# Altium PCB EP4CE55F23C8N_A.PcbDoc
Units mil, origin at the board's own origin, x right, y up, seen from the top; angles counter-clockwise.
Board outline 3300 x 3400 mil, 2 copper layers (Top Layer, Bottom Layer); 161 components, 160 nets, 648 pads, 484 vias.
Unrouted connection lines stored in the file: 160.
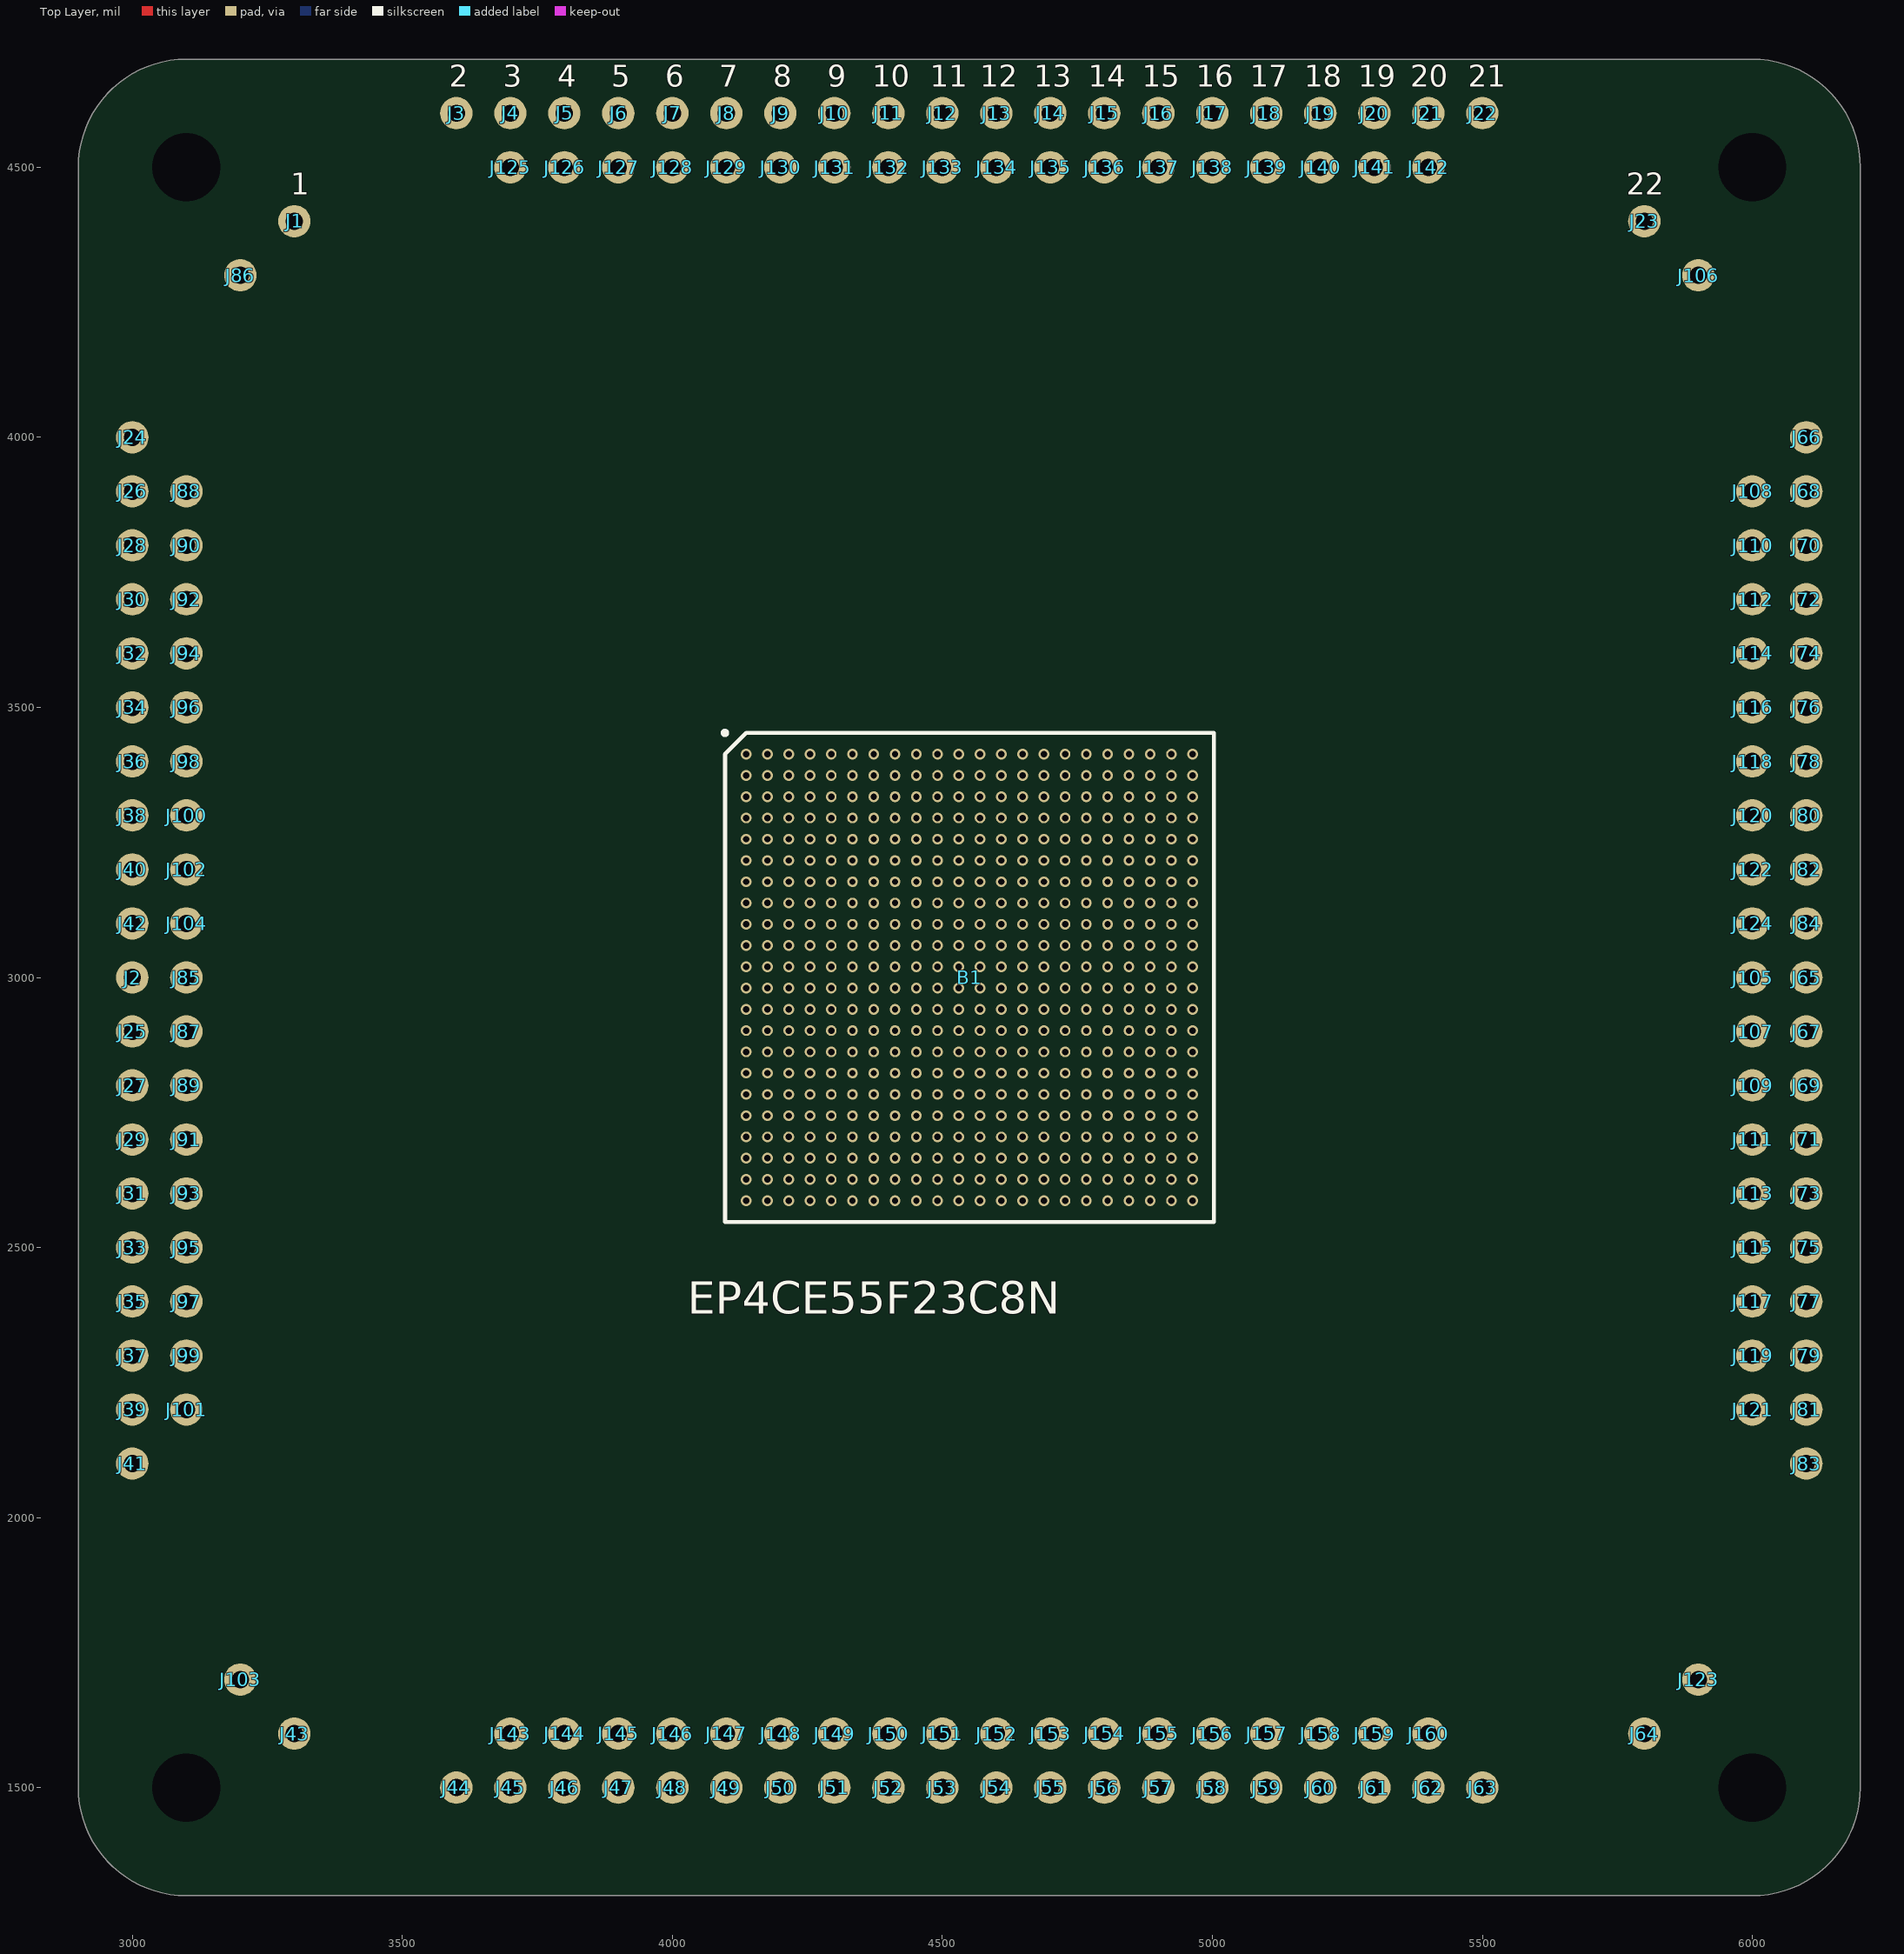
[diagram p0: Top Layer view]
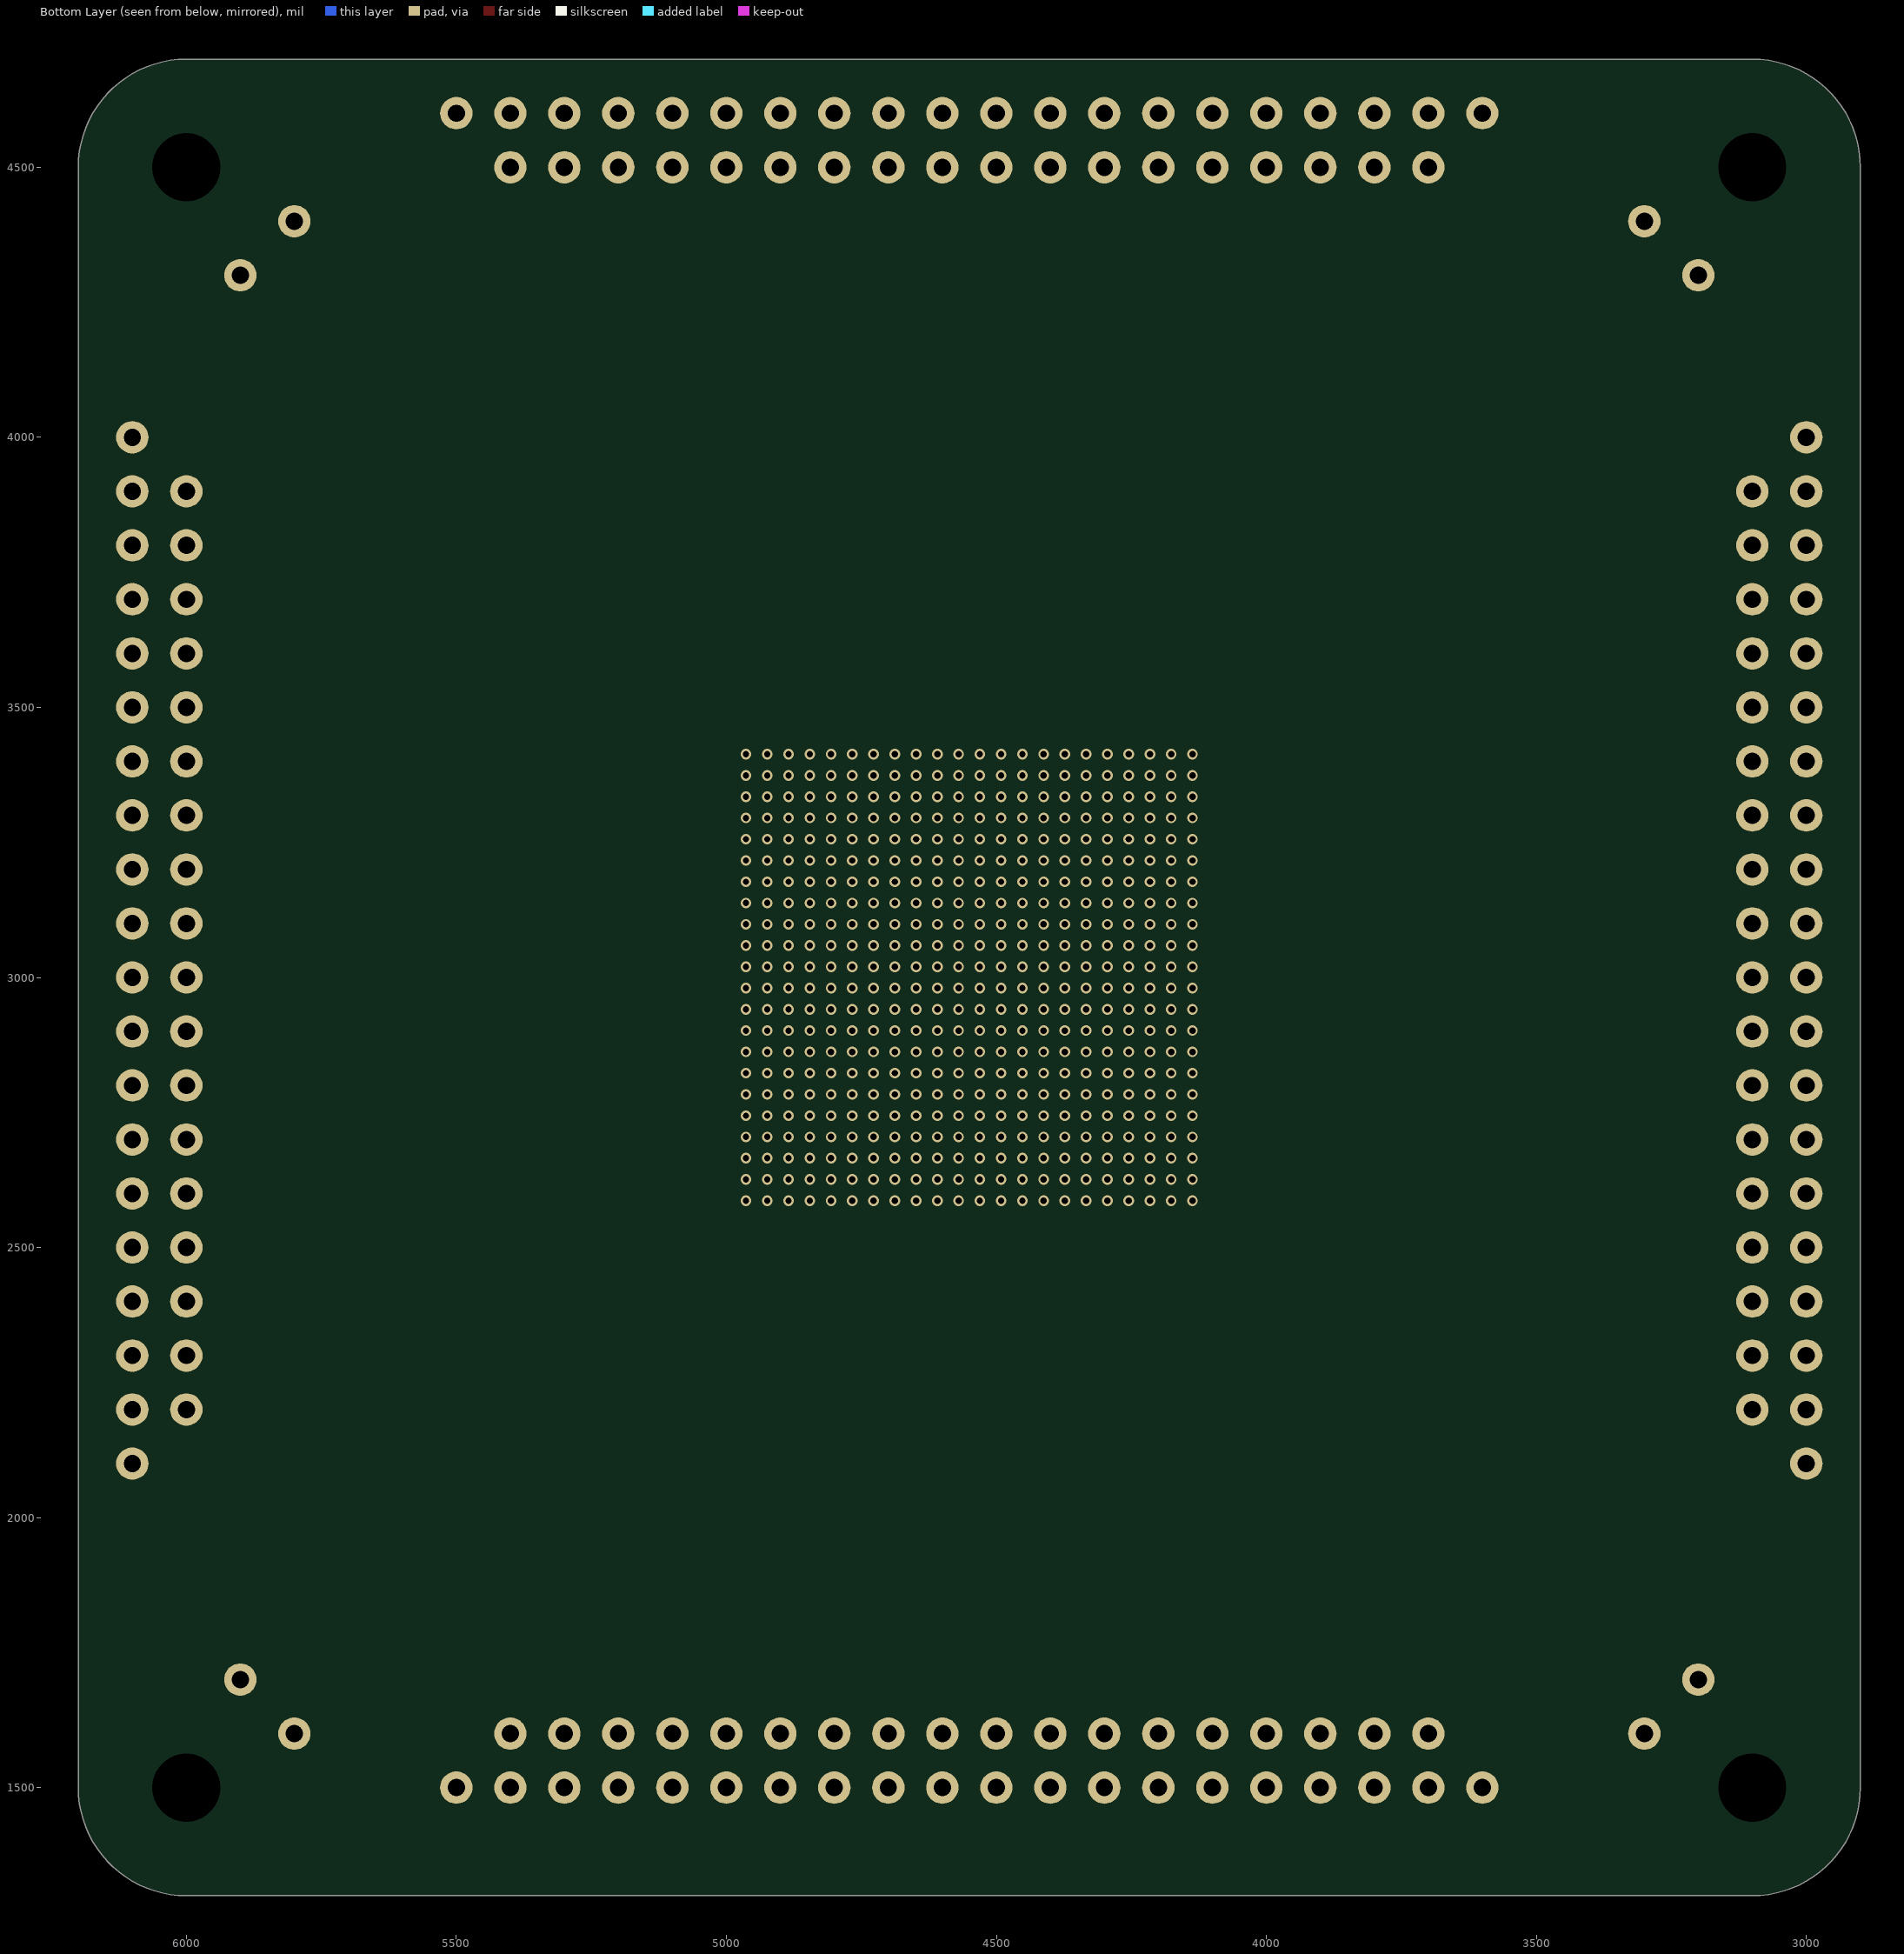
[diagram p1: Bottom Layer view, seen from below]

## Layer stack, top to bottom
Top Solder: solder mask 0.4, Solder Resist, Dk 3.5
Top Layer: signal copper 1.4
Dielectric 1: dielectric 12.6, FR-4, Dk 4.8
Bottom Layer: signal copper 1.4
Bottom Solder: solder mask 0.4, Solder Resist, Dk 3.5

## Board outline
2900,1500 ccw(c3100,1500) 3100,1300 6000,1300 ccw(c6000,1500) 6200,1500 6200,4500 ccw(c6000,4500) 6000,4700 3100,4700 ccw(c3100,4500) 2900,4500

## Design rules (kind name [scope] priority, off if disabled: settings)
Clearance [All] p1: gap=6 ignorepadtopadclearanceinfootprint=FALSE
HoleSize [All] p1: absolutevalues=TRUE maxlimit=200 minlimit=1 maxpercent=80.000 minpercent=20.000
PolygonConnect [All] p1: connectstyle=Relief reliefconductorwidth=10 reliefentries=4 polygonreliefangle="90 Angle" airgapwidth=10
RoutingVias [All] p1: holewidth=28 width=50 viastyle="Through Hole" minholewidth=28 minwidth=50 maxholewidth=28 maxwidth=50
SolderMaskExpansion [All] p1: expansion=4 istentingtop=FALSE
Width [All] p1: maxlimit=50 minlimit=7 preferedwidth=10 minimp=50.000000 maximp=50.000000 favimp=50.000000
29 further rules are at their usual default settings.

## Components (designator, comment, footprint, x,y, rotation, side; value= is the part's Value field where it differs from the comment)
B1 "EP4CE55F23C8N" BGA484C100P22X22_2300X2300X240 4550.2,3000 r0 top
J1 "Pin1" Pin1 3300,4400 r0 top
J2 "Pin1" Pin1 3000,3000 r0 top
J3 "Pin1" Pin1 3600,4600 r0 top
J4 "Pin1" Pin1 3700,4600 r0 top
J5 "Pin1" Pin1 3800,4600 r0 top
J6 "Pin1" Pin1 3900,4600 r0 top
J7 "Pin1" Pin1 4000,4600 r0 top
J8 "Pin1" Pin1 4100,4600 r0 top
J9 "Pin1" Pin1 4200,4600 r0 top
J10 "Pin1" Pin1 4300,4600 r0 top
J11 "Pin1" Pin1 4400,4600 r0 top
J12 "Pin1" Pin1 4500,4600 r0 top
J13 "Pin1" Pin1 4600,4600 r0 top
J14 "Pin1" Pin1 4700,4600 r0 top
J15 "Pin1" Pin1 4800,4600 r0 top
J16 "Pin1" Pin1 4900,4600 r0 top
J17 "Pin1" Pin1 5000,4600 r0 top
J18 "Pin1" Pin1 5100,4600 r0 top
J19 "Pin1" Pin1 5200,4600 r0 top
J20 "Pin1" Pin1 5300,4600 r0 top
J21 "Pin1" Pin1 5400,4600 r0 top
J22 "Pin1" Pin1 5500,4600 r0 top
J23 "Pin1" Pin1 5800,4400 r0 top
J24 "Pin1" Pin1 3000,4000 r0 top
J25 "Pin1" Pin1 3000,2900 r0 top
J26 "Pin1" Pin1 3000,3900 r0 top
J27 "Pin1" Pin1 3000,2800 r0 top
J28 "Pin1" Pin1 3000,3800 r0 top
J29 "Pin1" Pin1 3000,2700 r0 top
J30 "Pin1" Pin1 3000,3700 r0 top
J31 "Pin1" Pin1 3000,2600 r0 top
J32 "Pin1" Pin1 3000,3600 r0 top
J33 "Pin1" Pin1 3000,2500 r0 top
J34 "Pin1" Pin1 3000,3500 r0 top
J35 "Pin1" Pin1 3000,2400 r0 top
J36 "Pin1" Pin1 3000,3400 r0 top
J37 "Pin1" Pin1 3000,2300 r0 top
J38 "Pin1" Pin1 3000,3300 r0 top
J39 "Pin1" Pin1 3000,2200 r0 top
J40 "Pin1" Pin1 3000,3200 r0 top
J41 "Pin1" Pin1 3000,2100 r0 top
J42 "Pin1" Pin1 3000,3100 r0 top
J43 "Pin1" Pin1 3300,1600 r0 top
J44 "Pin1" Pin1 3600,1500 r0 top
J45 "Pin1" Pin1 3700,1500 r0 top
J46 "Pin1" Pin1 3800,1500 r0 top
J47 "Pin1" Pin1 3900,1500 r0 top
J48 "Pin1" Pin1 4000,1500 r0 top
J49 "Pin1" Pin1 4100,1500 r0 top
J50 "Pin1" Pin1 4200,1500 r0 top
J51 "Pin1" Pin1 4300,1500 r0 top
J52 "Pin1" Pin1 4400,1500 r0 top
J53 "Pin1" Pin1 4500,1500 r0 top
J54 "Pin1" Pin1 4600,1500 r0 top
J55 "Pin1" Pin1 4700,1500 r0 top
J56 "Pin1" Pin1 4800,1500 r0 top
J57 "Pin1" Pin1 4900,1500 r0 top
J58 "Pin1" Pin1 5000,1500 r0 top
J59 "Pin1" Pin1 5100,1500 r0 top
J60 "Pin1" Pin1 5200,1500 r0 top
J61 "Pin1" Pin1 5300,1500 r0 top
J62 "Pin1" Pin1 5400,1500 r0 top
J63 "Pin1" Pin1 5500,1500 r0 top
J64 "Pin1" Pin1 5800,1600 r0 top
J65 "Pin1" Pin1 6100,3000 r0 top
J66 "Pin1" Pin1 6100,4000 r0 top
J67 "Pin1" Pin1 6100,2900 r0 top
J68 "Pin1" Pin1 6100,3900 r0 top
J69 "Pin1" Pin1 6100,2800 r0 top
J70 "Pin1" Pin1 6100,3800 r0 top
J71 "Pin1" Pin1 6100,2700 r0 top
J72 "Pin1" Pin1 6100,3700 r0 top
J73 "Pin1" Pin1 6100,2600 r0 top
J74 "Pin1" Pin1 6100,3600 r0 top
J75 "Pin1" Pin1 6100,2500 r0 top
J76 "Pin1" Pin1 6100,3500 r0 top
J77 "Pin1" Pin1 6100,2400 r0 top
J78 "Pin1" Pin1 6100,3400 r0 top
J79 "Pin1" Pin1 6100,2300 r0 top
J80 "Pin1" Pin1 6100,3300 r0 top
J81 "Pin1" Pin1 6100,2200 r0 top
J82 "Pin1" Pin1 6100,3200 r0 top
J83 "Pin1" Pin1 6100,2100 r0 top
J84 "Pin1" Pin1 6100,3100 r0 top
J85 "Pin2" Pin1 3100,3000 r0 top
J86 "Pin2" Pin1 3200,4300 r0 top
J87 "Pin2" Pin1 3100,2900 r0 top
J88 "Pin2" Pin1 3100,3900 r0 top
J89 "Pin2" Pin1 3100,2800 r0 top
J90 "Pin2" Pin1 3100,3800 r0 top
J91 "Pin2" Pin1 3100,2700 r0 top
J92 "Pin2" Pin1 3100,3700 r0 top
J93 "Pin2" Pin1 3100,2600 r0 top
J94 "Pin2" Pin1 3100,3600 r0 top
J95 "Pin2" Pin1 3100,2500 r0 top
J96 "Pin2" Pin1 3100,3500 r0 top
J97 "Pin2" Pin1 3100,2400 r0 top
J98 "Pin2" Pin1 3100,3400 r0 top
J99 "Pin2" Pin1 3100,2300 r0 top
J100 "Pin2" Pin1 3100,3300 r0 top
J101 "Pin2" Pin1 3100,2200 r0 top
J102 "Pin2" Pin1 3100,3200 r0 top
J103 "Pin2" Pin1 3200,1700 r0 top
J104 "Pin2" Pin1 3100,3100 r0 top
J105 "Pin2" Pin1 6000,3000 r0 top
J106 "Pin2" Pin1 5900,4300 r0 top
J107 "Pin2" Pin1 6000,2900 r0 top
J108 "Pin2" Pin1 6000,3900 r0 top
J109 "Pin2" Pin1 6000,2800 r0 top
J110 "Pin2" Pin1 6000,3800 r0 top
J111 "Pin2" Pin1 6000,2700 r0 top
J112 "Pin2" Pin1 6000,3700 r0 top
J113 "Pin2" Pin1 6000,2600 r0 top
J114 "Pin2" Pin1 6000,3600 r0 top
J115 "Pin2" Pin1 6000,2500 r0 top
J116 "Pin2" Pin1 6000,3500 r0 top
J117 "Pin2" Pin1 6000,2400 r0 top
J118 "Pin2" Pin1 6000,3400 r0 top
J119 "Pin2" Pin1 6000,2300 r0 top
J120 "Pin2" Pin1 6000,3300 r0 top
J121 "Pin2" Pin1 6000,2200 r0 top
J122 "Pin2" Pin1 6000,3200 r0 top
J123 "Pin2" Pin1 5900,1700 r0 top
J124 "Pin2" Pin1 6000,3100 r0 top
J125 "Pin2" Pin1 3700,4500 r0 top
J126 "Pin2" Pin1 3800,4500 r0 top
J127 "Pin2" Pin1 3900,4500 r0 top
J128 "Pin2" Pin1 4000,4500 r0 top
J129 "Pin2" Pin1 4100,4500 r0 top
J130 "Pin2" Pin1 4200,4500 r0 top
J131 "Pin2" Pin1 4300,4500 r0 top
J132 "Pin2" Pin1 4400,4500 r0 top
J133 "Pin2" Pin1 4500,4500 r0 top
J134 "Pin2" Pin1 4600,4500 r0 top
J135 "Pin2" Pin1 4700,4500 r0 top
J136 "Pin2" Pin1 4800,4500 r0 top
J137 "Pin2" Pin1 4900,4500 r0 top
J138 "Pin2" Pin1 5000,4500 r0 top
J139 "Pin2" Pin1 5100,4500 r0 top
J140 "Pin2" Pin1 5200,4500 r0 top
J141 "Pin2" Pin1 5300,4500 r0 top
J142 "Pin2" Pin1 5400,4500 r0 top
J143 "Pin2" Pin1 3700,1600 r0 top
J144 "Pin2" Pin1 3800,1600 r0 top
J145 "Pin2" Pin1 3900,1600 r0 top
J146 "Pin2" Pin1 4000,1600 r0 top
J147 "Pin2" Pin1 4100,1600 r0 top
J148 "Pin2" Pin1 4200,1600 r0 top
J149 "Pin2" Pin1 4300,1600 r0 top
J150 "Pin2" Pin1 4400,1600 r0 top
J151 "Pin2" Pin1 4500,1600 r0 top
J152 "Pin2" Pin1 4600,1600 r0 top
J153 "Pin2" Pin1 4700,1600 r0 top
J154 "Pin2" Pin1 4800,1600 r0 top
J155 "Pin2" Pin1 4900,1600 r0 top
J156 "Pin2" Pin1 5000,1600 r0 top
J157 "Pin2" Pin1 5100,1600 r0 top
J158 "Pin2" Pin1 5200,1600 r0 top
J159 "Pin2" Pin1 5300,1600 r0 top
J160 "Pin2" Pin1 5400,1600 r0 top

## Footprints (in the part's own frame and the unit in brackets; to place one, negate y for a bottom-side part, rotate by r counter-clockwise, add the part's x,y. Pads: shape width x height; smd on the part's side, far side on the other; paste and mask are expansions set on the pad)
BGA484C100P22X22_2300X2300X240 [mm]
  round 0.5 smd: A1(-10.5,10.5) A2(-9.5,10.5) A3(-8.5,10.5) A4(-7.5,10.5) A5(-6.5,10.5) A6(-5.5,10.5) A7(-4.5,10.5) A8(-3.5,10.5) A9(-2.5,10.5) A10(-1.5,10.5) A11(-0.5,10.5) A12(0.5,10.5) A13(1.5,10.5) A14(2.5,10.5) A15(3.5,10.5) A16(4.5,10.5) A17(5.5,10.5) A18(6.5,10.5) A19(7.5,10.5) A20(8.5,10.5) A21(9.5,10.5) A22(10.5,10.5) AA1(-10.5,-9.5) AA2(-9.5,-9.5) AA3(-8.5,-9.5) AA4(-7.5,-9.5) AA5(-6.5,-9.5) AA6(-5.5,-9.5) AA7(-4.5,-9.5) AA8(-3.5,-9.5) AA9(-2.5,-9.5) AA10(-1.5,-9.5) AA11(-0.5,-9.5) AA12(0.5,-9.5) AA13(1.5,-9.5) AA14(2.5,-9.5) AA15(3.5,-9.5) AA16(4.5,-9.5) AA17(5.5,-9.5) AA18(6.5,-9.5) AA19(7.5,-9.5) AA20(8.5,-9.5) AA21(9.5,-9.5) AA22(10.5,-9.5) AB1(-10.5,-10.5) AB2(-9.5,-10.5) AB3(-8.5,-10.5) AB4(-7.5,-10.5) AB5(-6.5,-10.5) AB6(-5.5,-10.5) AB7(-4.5,-10.5) AB8(-3.5,-10.5) AB9(-2.5,-10.5) AB10(-1.5,-10.5) AB11(-0.5,-10.5) AB12(0.5,-10.5) AB13(1.5,-10.5) AB14(2.5,-10.5) AB15(3.5,-10.5) AB16(4.5,-10.5) AB17(5.5,-10.5) AB18(6.5,-10.5) AB19(7.5,-10.5) AB20(8.5,-10.5) AB21(9.5,-10.5) AB22(10.5,-10.5) B1(-10.5,9.5) B2(-9.5,9.5) B3(-8.5,9.5) B4(-7.5,9.5) B5(-6.5,9.5) B6(-5.5,9.5) B7(-4.5,9.5) B8(-3.5,9.5) B9(-2.5,9.5) B10(-1.5,9.5) B11(-0.5,9.5) B12(0.5,9.5) B13(1.5,9.5) B14(2.5,9.5) B15(3.5,9.5) B16(4.5,9.5) B17(5.5,9.5) B18(6.5,9.5) B19(7.5,9.5) B20(8.5,9.5) B21(9.5,9.5) B22(10.5,9.5) C1(-10.5,8.5) C2(-9.5,8.5) C3(-8.5,8.5) C4(-7.5,8.5) C5(-6.5,8.5) C6(-5.5,8.5) C7(-4.5,8.5) C8(-3.5,8.5) C9(-2.5,8.5) C10(-1.5,8.5) C11(-0.5,8.5) C12(0.5,8.5) C13(1.5,8.5) C14(2.5,8.5) C15(3.5,8.5) C16(4.5,8.5) C17(5.5,8.5) C18(6.5,8.5) C19(7.5,8.5) C20(8.5,8.5) C21(9.5,8.5) C22(10.5,8.5) D1(-10.5,7.5) D2(-9.5,7.5) D3(-8.5,7.5) D4(-7.5,7.5) D5(-6.5,7.5) D6(-5.5,7.5) D7(-4.5,7.5) D8(-3.5,7.5) D9(-2.5,7.5) D10(-1.5,7.5) D11(-0.5,7.5) D12(0.5,7.5) D13(1.5,7.5) D14(2.5,7.5) D15(3.5,7.5) D16(4.5,7.5) D17(5.5,7.5) D18(6.5,7.5) D19(7.5,7.5) D20(8.5,7.5) D21(9.5,7.5) D22(10.5,7.5) E1(-10.5,6.5) E2(-9.5,6.5) E3(-8.5,6.5) E4(-7.5,6.5) E5(-6.5,6.5) E6(-5.5,6.5) E7(-4.5,6.5) E8(-3.5,6.5) E9(-2.5,6.5) E10(-1.5,6.5) E11(-0.5,6.5) E12(0.5,6.5) E13(1.5,6.5) E14(2.5,6.5) E15(3.5,6.5) E16(4.5,6.5) E17(5.5,6.5) E18(6.5,6.5) E19(7.5,6.5) E20(8.5,6.5) E21(9.5,6.5) E22(10.5,6.5) F1(-10.5,5.5) F2(-9.5,5.5) F3(-8.5,5.5) F4(-7.5,5.5) F5(-6.5,5.5) F6(-5.5,5.5) F7(-4.5,5.5) F8(-3.5,5.5) F9(-2.5,5.5) F10(-1.5,5.5) F11(-0.5,5.5) F12(0.5,5.5) F13(1.5,5.5) F14(2.5,5.5) F15(3.5,5.5) F16(4.5,5.5) F17(5.5,5.5) F18(6.5,5.5) F19(7.5,5.5) F20(8.5,5.5) F21(9.5,5.5) F22(10.5,5.5) G1(-10.5,4.5) G2(-9.5,4.5) G3(-8.5,4.5) G4(-7.5,4.5) G5(-6.5,4.5) G6(-5.5,4.5) G7(-4.5,4.5) G8(-3.5,4.5) G9(-2.5,4.5) G10(-1.5,4.5) G11(-0.5,4.5) G12(0.5,4.5) G13(1.5,4.5) G14(2.5,4.5) G15(3.5,4.5) G16(4.5,4.5) G17(5.5,4.5) G18(6.5,4.5) G19(7.5,4.5) G20(8.5,4.5) G21(9.5,4.5) G22(10.5,4.5) H1(-10.5,3.5) H2(-9.5,3.5) H3(-8.5,3.5) H4(-7.5,3.5) H5(-6.5,3.5) H6(-5.5,3.5) H7(-4.5,3.5) H8(-3.5,3.5) H9(-2.5,3.5) H10(-1.5,3.5) H11(-0.5,3.5) H12(0.5,3.5) H13(1.5,3.5) H14(2.5,3.5) H15(3.5,3.5) H16(4.5,3.5) H17(5.5,3.5) H18(6.5,3.5) H19(7.5,3.5) H20(8.5,3.5) H21(9.5,3.5) H22(10.5,3.5) J1(-10.5,2.5) J2(-9.5,2.5) J3(-8.5,2.5) J4(-7.5,2.5) J5(-6.5,2.5) J6(-5.5,2.5) J7(-4.5,2.5) J8(-3.5,2.5) J9(-2.5,2.5) J10(-1.5,2.5) J11(-0.5,2.5) J12(0.5,2.5) J13(1.5,2.5) J14(2.5,2.5) J15(3.5,2.5) J16(4.5,2.5) J17(5.5,2.5) J18(6.5,2.5) J19(7.5,2.5) J20(8.5,2.5) J21(9.5,2.5) J22(10.5,2.5) K1(-10.5,1.5) K2(-9.5,1.5) K3(-8.5,1.5) K4(-7.5,1.5) K5(-6.5,1.5) K6(-5.5,1.5) K7(-4.5,1.5) K8(-3.5,1.5) K9(-2.5,1.5) K10(-1.5,1.5) K11(-0.5,1.5) K12(0.5,1.5) K13(1.5,1.5) K14(2.5,1.5) K15(3.5,1.5) K16(4.5,1.5) K17(5.5,1.5) K18(6.5,1.5) K19(7.5,1.5) K20(8.5,1.5) K21(9.5,1.5) K22(10.5,1.5) L1(-10.5,0.5) L2(-9.5,0.5) L3(-8.5,0.5) L4(-7.5,0.5) L5(-6.5,0.5) L6(-5.5,0.5) L7(-4.5,0.5) L8(-3.5,0.5) L9(-2.5,0.5) L10(-1.5,0.5) L11(-0.5,0.5) L12(0.5,0.5) L13(1.5,0.5) L14(2.5,0.5) L15(3.5,0.5) L16(4.5,0.5) L17(5.5,0.5) L18(6.5,0.5) L19(7.5,0.5) L20(8.5,0.5) L21(9.5,0.5) L22(10.5,0.5) M1(-10.5,-0.5) M2(-9.5,-0.5) M3(-8.5,-0.5) M4(-7.5,-0.5) M5(-6.5,-0.5) M6(-5.5,-0.5) M7(-4.5,-0.5) M8(-3.5,-0.5) M9(-2.5,-0.5) M10(-1.5,-0.5) M11(-0.5,-0.5) M12(0.5,-0.5) M13(1.5,-0.5) M14(2.5,-0.5) M15(3.5,-0.5) M16(4.5,-0.5) M17(5.5,-0.5) M18(6.5,-0.5) M19(7.5,-0.5) M20(8.5,-0.5) M21(9.5,-0.5) M22(10.5,-0.5) N1(-10.5,-1.5) N2(-9.5,-1.5) N3(-8.5,-1.5) N4(-7.5,-1.5) N5(-6.5,-1.5) N6(-5.5,-1.5) N7(-4.5,-1.5) N8(-3.5,-1.5) N9(-2.5,-1.5) N10(-1.5,-1.5) N11(-0.5,-1.5) N12(0.5,-1.5) N13(1.5,-1.5) N14(2.5,-1.5) N15(3.5,-1.5) N16(4.5,-1.5) N17(5.5,-1.5) N18(6.5,-1.5) N19(7.5,-1.5) N20(8.5,-1.5) N21(9.5,-1.5) N22(10.5,-1.5) P1(-10.5,-2.5) P2(-9.5,-2.5) P3(-8.5,-2.5) P4(-7.5,-2.5) P5(-6.5,-2.5) P6(-5.5,-2.5) P7(-4.5,-2.5) P8(-3.5,-2.5) P9(-2.5,-2.5) P10(-1.5,-2.5) P11(-0.5,-2.5) P12(0.5,-2.5) P13(1.5,-2.5) P14(2.5,-2.5) P15(3.5,-2.5) P16(4.5,-2.5) P17(5.5,-2.5) P18(6.5,-2.5) P19(7.5,-2.5) P20(8.5,-2.5) P21(9.5,-2.5) P22(10.5,-2.5) R1(-10.5,-3.5) R2(-9.5,-3.5) R3(-8.5,-3.5) R4(-7.5,-3.5) R5(-6.5,-3.5) R6(-5.5,-3.5) R7(-4.5,-3.5) R8(-3.5,-3.5) R9(-2.5,-3.5) R10(-1.5,-3.5) R11(-0.5,-3.5) R12(0.5,-3.5) R13(1.5,-3.5) R14(2.5,-3.5) R15(3.5,-3.5) R16(4.5,-3.5) R17(5.5,-3.5) R18(6.5,-3.5) R19(7.5,-3.5) R20(8.5,-3.5) R21(9.5,-3.5) R22(10.5,-3.5) T1(-10.5,-4.5) T2(-9.5,-4.5) T3(-8.5,-4.5) T4(-7.5,-4.5) T5(-6.5,-4.5) T6(-5.5,-4.5) T7(-4.5,-4.5) T8(-3.5,-4.5) T9(-2.5,-4.5) T10(-1.5,-4.5) T11(-0.5,-4.5) T12(0.5,-4.5) T13(1.5,-4.5) T14(2.5,-4.5) T15(3.5,-4.5) T16(4.5,-4.5) T17(5.5,-4.5) T18(6.5,-4.5) T19(7.5,-4.5) T20(8.5,-4.5) T21(9.5,-4.5) T22(10.5,-4.5) U1(-10.5,-5.5) U2(-9.5,-5.5) U3(-8.5,-5.5) U4(-7.5,-5.5) U5(-6.5,-5.5) U6(-5.5,-5.5) U7(-4.5,-5.5) U8(-3.5,-5.5) U9(-2.5,-5.5) U10(-1.5,-5.5) U11(-0.5,-5.5) U12(0.5,-5.5) U13(1.5,-5.5) U14(2.5,-5.5) U15(3.5,-5.5) U16(4.5,-5.5) U17(5.5,-5.5) U18(6.5,-5.5) U19(7.5,-5.5) U20(8.5,-5.5) U21(9.5,-5.5) U22(10.5,-5.5) V1(-10.5,-6.5) V2(-9.5,-6.5) V3(-8.5,-6.5) V4(-7.5,-6.5) V5(-6.5,-6.5) V6(-5.5,-6.5) V7(-4.5,-6.5) V8(-3.5,-6.5) V9(-2.5,-6.5) V10(-1.5,-6.5) V11(-0.5,-6.5) V12(0.5,-6.5) V13(1.5,-6.5) V14(2.5,-6.5) V15(3.5,-6.5) V16(4.5,-6.5) V17(5.5,-6.5) V18(6.5,-6.5) V19(7.5,-6.5) V20(8.5,-6.5) V21(9.5,-6.5) V22(10.5,-6.5) W1(-10.5,-7.5) W2(-9.5,-7.5) W3(-8.5,-7.5) W4(-7.5,-7.5) W5(-6.5,-7.5) W6(-5.5,-7.5) W7(-4.5,-7.5) W8(-3.5,-7.5) W9(-2.5,-7.5) W10(-1.5,-7.5) W11(-0.5,-7.5) W12(0.5,-7.5) W13(1.5,-7.5) W14(2.5,-7.5) W15(3.5,-7.5) W16(4.5,-7.5) W17(5.5,-7.5) W18(6.5,-7.5) W19(7.5,-7.5) W20(8.5,-7.5) W21(9.5,-7.5) W22(10.5,-7.5) Y1(-10.5,-8.5) Y2(-9.5,-8.5) Y3(-8.5,-8.5) Y4(-7.5,-8.5) Y5(-6.5,-8.5) Y6(-5.5,-8.5) Y7(-4.5,-8.5) Y8(-3.5,-8.5) Y9(-2.5,-8.5) Y10(-1.5,-8.5) Y11(-0.5,-8.5) Y12(0.5,-8.5) Y13(1.5,-8.5) Y14(2.5,-8.5) Y15(3.5,-8.5) Y16(4.5,-8.5) Y17(5.5,-8.5) Y18(6.5,-8.5) Y19(7.5,-8.5) Y20(8.5,-8.5) Y21(9.5,-8.5) Y22(10.5,-8.5)
  silkscreen extent -11.6,-11.5 11.5,11.6
Pin1 [mil]
  round 60 hole 32: 1(0,0)

## Part data
B1: "FPGA - Field Programmable Gate Array FPGA - Cyclone IV E 3491 LABs 324 IOs", Manufacturer_Name=Intel, Mouser Part Number=989-EP4CE55F23C8N, Arrow Part Number=EP4CE55F23C8N, Arrow Price/Stock=https://www.arrow.com/en/products/ep4ce55f23c8n/alteraintel-programmable-solutions?utm_currency=USD&region=nac, Datasheet Link=https://www.intel.com/content/dam/www/programmable/us/en/pdfs/literature/packaging/04r00416-03.pdf, Geometry.Height=2.4mm, Manufacturer_Part_Number=EP4CE55F23C8N, Mouser Price/Stock=https://www.mouser.co.uk/ProductDetail/Altera/EP4CE55F23C8N?qs=jblrfmjbeiF3merBMihRew%3D%3D
J85 J86 J87 J88 J89 J90 J91 J92 J93 J94 J95 J96 J97 J98 J99 J100 J101 J102 J103 J104 J105 J106 J107 J108 J109 J110 J111 J112 J113 J114 J115 J116 J117 J118 J119 J120 J121 J122 J123 J124 J125 J126 J127 J128 J129 J130 J131 J132 J133 J134 J135 J136 J137 J138 J139 J140 J141 J142 J143 J144 J145 J146 J147 J148 J149 J150 J151 J152 J153 J154 J155 J156 J157 J158 J159 J160: library part Pin1

## Free pads (board coordinates)
  round 0 hole 125.98 unplated: 6(3100,1500) 6(3100,4500) 6(6000,1500) 6(6000,4500)

## Via types
v1: diameter 19.68, hole 11.81, Top Layer to Bottom Layer, 484 vias

## Nets (pads, with @x,y where several pads share a name; then routed paths per layer and width w, separated by ;. In a path a pad name is that pad's centre, name@x,y a point inside that pad or via, vN(x,y) a via of type N, cw(c..) or ccw(c..) an arc to the next point about the centre after c; other vN are vias at no path point)
NetB1_A1: B1.A1 J1.1
  other v1: 4136.81,3413.39
NetB1_A2: B1.A2 J3.1
  other v1: 4176.18,3413.39
NetB1_A3: B1.A3 J4.1
  other v1: 4215.55,3413.39
NetB1_A4: B1.A4 J5.1
  other v1: 4254.92,3413.39
NetB1_A5: B1.A5 J6.1
  other v1: 4294.29,3413.39
NetB1_A6: B1.A6 J7.1
  other v1: 4333.66,3413.39
NetB1_A7: B1.A7 J8.1
  other v1: 4373.03,3413.39
NetB1_A8: B1.A8 J9.1
  other v1: 4412.4,3413.39
NetB1_A9: B1.A9 J10.1
  other v1: 4451.77,3413.39
NetB1_A10: B1.A10 J11.1
  other v1: 4491.14,3413.39
NetB1_A11: B1.A11 J12.1
  other v1: 4530.51,3413.39
NetB1_A12: B1.A12 J13.1
  other v1: 4569.88,3413.39
NetB1_A13: B1.A13 J14.1
  other v1: 4609.25,3413.39
NetB1_A14: B1.A14 J15.1
  other v1: 4648.62,3413.39
NetB1_A15: B1.A15 J16.1
  other v1: 4687.99,3413.39
NetB1_A16: B1.A16 J17.1
  other v1: 4727.36,3413.39
NetB1_A17: B1.A17 J18.1
  other v1: 4766.73,3413.39
NetB1_A18: B1.A18 J19.1
  other v1: 4806.1,3413.39
NetB1_A19: B1.A19 J20.1
  other v1: 4845.47,3413.39
NetB1_A20: B1.A20 J21.1
  other v1: 4884.84,3413.39
NetB1_A21: B1.A21 J22.1
  other v1: 4924.21,3413.39
NetB1_A22: B1.A22 J23.1
  other v1: 4963.58,3413.39
NetB1_AA1: B1.AA1 J41.1
  other v1: 4136.81,2625.98
NetB1_AA2: B1.AA2 J103.1
  other v1: 4176.18,2625.98
NetB1_AA3: B1.AA3 J143.1
  other v1: 4215.55,2625.98
NetB1_AA4: B1.AA4 J144.1
  other v1: 4254.92,2625.98
NetB1_AA5: B1.AA5 J145.1
  other v1: 4294.29,2625.98
NetB1_AA6: B1.AA6 J146.1
  other v1: 4333.66,2625.98
NetB1_AA7: B1.AA7 J147.1
  other v1: 4373.03,2625.98
NetB1_AA8: B1.AA8 J148.1
  other v1: 4412.4,2625.98
NetB1_AA9: B1.AA9 J149.1
  other v1: 4451.77,2625.98
NetB1_AA10: B1.AA10 J150.1
  other v1: 4491.14,2625.98
NetB1_AA11: B1.AA11 J151.1
  other v1: 4530.51,2625.98
NetB1_AA12: B1.AA12 J152.1
  other v1: 4569.88,2625.98
NetB1_AA13: B1.AA13 J153.1
  other v1: 4609.25,2625.98
NetB1_AA14: B1.AA14 J154.1
  other v1: 4648.62,2625.98
NetB1_AA15: B1.AA15 J155.1
  other v1: 4687.99,2625.98
NetB1_AA16: B1.AA16 J156.1
  other v1: 4727.36,2625.98
NetB1_AA17: B1.AA17 J157.1
  other v1: 4766.73,2625.98
NetB1_AA18: B1.AA18 J158.1
  other v1: 4806.1,2625.98
NetB1_AA19: B1.AA19 J159.1
  other v1: 4845.47,2625.98
NetB1_AA20: B1.AA20 J160.1
  other v1: 4884.84,2625.98
NetB1_AA21: B1.AA21 J123.1
  other v1: 4924.21,2625.98
NetB1_AA22: B1.AA22 J83.1
  other v1: 4963.58,2625.98
NetB1_AB1: B1.AB1 J43.1
  other v1: 4136.81,2586.61
NetB1_AB2: B1.AB2 J44.1
  other v1: 4176.18,2586.61
NetB1_AB3: B1.AB3 J45.1
  other v1: 4215.55,2586.61
NetB1_AB4: B1.AB4 J46.1
  other v1: 4254.92,2586.61
NetB1_AB5: B1.AB5 J47.1
  other v1: 4294.29,2586.61
NetB1_AB6: B1.AB6 J48.1
  other v1: 4333.66,2586.61
NetB1_AB7: B1.AB7 J49.1
  other v1: 4373.03,2586.61
NetB1_AB8: B1.AB8 J50.1
  other v1: 4412.4,2586.61
NetB1_AB9: B1.AB9 J51.1
  other v1: 4451.77,2586.61
NetB1_AB10: B1.AB10 J52.1
  other v1: 4491.14,2586.61
NetB1_AB11: B1.AB11 J53.1
  other v1: 4530.51,2586.61
NetB1_AB12: B1.AB12 J54.1
  other v1: 4569.88,2586.61
NetB1_AB13: B1.AB13 J55.1
  other v1: 4609.25,2586.61
NetB1_AB14: B1.AB14 J56.1
  other v1: 4648.62,2586.61
NetB1_AB15: B1.AB15 J57.1
  other v1: 4687.99,2586.61
NetB1_AB16: B1.AB16 J58.1
  other v1: 4727.36,2586.61
NetB1_AB17: B1.AB17 J59.1
  other v1: 4766.73,2586.61
NetB1_AB18: B1.AB18 J60.1
  other v1: 4806.1,2586.61
NetB1_AB19: B1.AB19 J61.1
  other v1: 4845.47,2586.61
NetB1_AB20: B1.AB20 J62.1
  other v1: 4884.84,2586.61
NetB1_AB21: B1.AB21 J63.1
  other v1: 4924.21,2586.61
NetB1_AB22: B1.AB22 J64.1
  other v1: 4963.58,2586.61
NetB1_B1: B1.B1 J24.1
  other v1: 4136.81,3374.02
NetB1_B2: B1.B2 J86.1
  other v1: 4176.18,3374.02
NetB1_B3: B1.B3 J125.1
  other v1: 4215.55,3374.02
NetB1_B4: B1.B4 J126.1
  other v1: 4254.92,3374.02
NetB1_B5: B1.B5 J127.1
  other v1: 4294.29,3374.02
NetB1_B6: B1.B6 J128.1
  other v1: 4333.66,3374.02
NetB1_B7: B1.B7 J129.1
  other v1: 4373.03,3374.02
NetB1_B8: B1.B8 J130.1
  other v1: 4412.4,3374.02
NetB1_B9: B1.B9 J131.1
  other v1: 4451.77,3374.02
NetB1_B10: B1.B10 J132.1
  other v1: 4491.14,3374.02
NetB1_B11: B1.B11 J133.1
  other v1: 4530.51,3374.02
NetB1_B12: B1.B12 J134.1
  other v1: 4569.88,3374.02
NetB1_B13: B1.B13 J135.1
  other v1: 4609.25,3374.02
NetB1_B14: B1.B14 J136.1
  other v1: 4648.62,3374.02
NetB1_B15: B1.B15 J137.1
  other v1: 4687.99,3374.02
NetB1_B16: B1.B16 J138.1
  other v1: 4727.36,3374.02
NetB1_B17: B1.B17 J139.1
  other v1: 4766.73,3374.02
NetB1_B18: B1.B18 J140.1
  other v1: 4806.1,3374.02
NetB1_B19: B1.B19 J141.1
  other v1: 4845.47,3374.02
NetB1_B20: B1.B20 J142.1
  other v1: 4884.84,3374.02
NetB1_B21: B1.B21 J106.1
  other v1: 4924.21,3374.02
NetB1_B22: B1.B22 J66.1
  other v1: 4963.58,3374.02
NetB1_C1: B1.C1 J26.1
  other v1: 4136.81,3334.65
NetB1_C2: B1.C2 J88.1
  other v1: 4176.18,3334.65
NetB1_C21: B1.C21 J108.1
  other v1: 4924.21,3334.65
NetB1_C22: B1.C22 J68.1
  other v1: 4963.58,3334.65
NetB1_D1: B1.D1 J28.1
  other v1: 4136.81,3295.28
NetB1_D2: B1.D2 J90.1
  other v1: 4176.18,3295.28
NetB1_D21: B1.D21 J110.1
  other v1: 4924.21,3295.28
NetB1_D22: B1.D22 J70.1
  other v1: 4963.58,3295.28
NetB1_E1: B1.E1 J30.1
  other v1: 4136.81,3255.91
NetB1_E2: B1.E2 J92.1
  other v1: 4176.18,3255.91
NetB1_E21: B1.E21 J112.1
  other v1: 4924.21,3255.91
NetB1_E22: B1.E22 J72.1
  other v1: 4963.58,3255.91
NetB1_F1: B1.F1 J32.1
  other v1: 4136.81,3216.54
NetB1_F2: B1.F2 J94.1
  other v1: 4176.18,3216.54
NetB1_F21: B1.F21 J114.1
  other v1: 4924.21,3216.54
NetB1_F22: B1.F22 J74.1
  other v1: 4963.58,3216.54
NetB1_G1: B1.G1 J34.1
  other v1: 4136.81,3177.17
NetB1_G2: B1.G2 J96.1
  other v1: 4176.18,3177.17
NetB1_G21: B1.G21 J116.1
  other v1: 4924.21,3177.17
NetB1_G22: B1.G22 J76.1
  other v1: 4963.58,3177.17
NetB1_H1: B1.H1 J36.1
  other v1: 4136.81,3137.8
NetB1_H2: B1.H2 J98.1
  other v1: 4176.18,3137.8
NetB1_H21: B1.H21 J118.1
  other v1: 4924.21,3137.8
NetB1_H22: B1.H22 J78.1
  other v1: 4963.58,3137.8
NetB1_J1: B1.J1 J38.1
  other v1: 4136.81,3098.43
NetB1_J2: B1.J2 J100.1
  other v1: 4176.18,3098.43
NetB1_J21: B1.J21 J120.1
  other v1: 4924.21,3098.43
NetB1_J22: B1.J22 J80.1
  other v1: 4963.58,3098.43
NetB1_K1: B1.K1 J40.1
  other v1: 4136.81,3059.05
NetB1_K2: B1.K2 J102.1
  other v1: 4176.18,3059.05
NetB1_K21: B1.K21 J122.1
  other v1: 4924.21,3059.05
NetB1_K22: B1.K22 J82.1
  other v1: 4963.58,3059.05
NetB1_L1: B1.L1 J42.1
  other v1: 4136.81,3019.68
NetB1_L2: B1.L2 J104.1
  other v1: 4176.18,3019.68
NetB1_L21: B1.L21 J124.1
  other v1: 4924.21,3019.68
NetB1_L22: B1.L22 J84.1
  other v1: 4963.58,3019.68
NetB1_M1: B1.M1 J2.1
  other v1: 4136.81,2980.31
NetB1_M2: B1.M2 J85.1
  other v1: 4176.18,2980.31
NetB1_M21: B1.M21 J105.1
  other v1: 4924.21,2980.31
NetB1_M22: B1.M22 J65.1
  other v1: 4963.58,2980.31
NetB1_N1: B1.N1 J25.1
  other v1: 4136.81,2940.94
NetB1_N2: B1.N2 J87.1
  other v1: 4176.18,2940.94
NetB1_N21: B1.N21 J107.1
  other v1: 4924.21,2940.94
NetB1_N22: B1.N22 J67.1
  other v1: 4963.58,2940.94
NetB1_P1: B1.P1 J27.1
  other v1: 4136.81,2901.57
NetB1_P2: B1.P2 J89.1
  other v1: 4176.18,2901.57
NetB1_P21: B1.P21 J109.1
  other v1: 4924.21,2901.57
NetB1_P22: B1.P22 J69.1
  other v1: 4963.58,2901.57
NetB1_R1: B1.R1 J29.1
  other v1: 4136.81,2862.2
NetB1_R2: B1.R2 J91.1
  other v1: 4176.18,2862.2
NetB1_R21: B1.R21 J111.1
  other v1: 4924.21,2862.2
NetB1_R22: B1.R22 J71.1
  other v1: 4963.58,2862.2
NetB1_T1: B1.T1 J31.1
  other v1: 4136.81,2822.83
NetB1_T2: B1.T2 J93.1
  other v1: 4176.18,2822.83
NetB1_T21: B1.T21 J113.1
  other v1: 4924.21,2822.83
NetB1_T22: B1.T22 J73.1
  other v1: 4963.58,2822.83
NetB1_U1: B1.U1 J33.1
  other v1: 4136.81,2783.46
NetB1_U2: B1.U2 J95.1
  other v1: 4176.18,2783.46
NetB1_U21: B1.U21 J115.1
  other v1: 4924.21,2783.46
NetB1_U22: B1.U22 J75.1
  other v1: 4963.58,2783.46
NetB1_V1: B1.V1 J35.1
  other v1: 4136.81,2744.09
NetB1_V2: B1.V2 J97.1
  other v1: 4176.18,2744.09
NetB1_V21: B1.V21 J117.1
  other v1: 4924.21,2744.09
NetB1_V22: B1.V22 J77.1
  other v1: 4963.58,2744.09
NetB1_W1: B1.W1 J37.1
  other v1: 4136.81,2704.72
NetB1_W2: B1.W2 J99.1
  other v1: 4176.18,2704.72
NetB1_W21: B1.W21 J119.1
  other v1: 4924.21,2704.72
NetB1_W22: B1.W22 J79.1
  other v1: 4963.58,2704.72
NetB1_Y1: B1.Y1 J39.1
  other v1: 4136.81,2665.35
NetB1_Y2: B1.Y2 J101.1
  other v1: 4176.18,2665.35
NetB1_Y21: B1.Y21 J121.1
  other v1: 4924.21,2665.35
NetB1_Y22: B1.Y22 J81.1
  other v1: 4963.58,2665.35
pads on no net: B1.C3 B1.C4 B1.C5 B1.C6 B1.C7 B1.C8 B1.C9 B1.C10 B1.C11 B1.C12 B1.C13 B1.C14 B1.C15 B1.C16 B1.C17 B1.C18 B1.C19 B1.C20 B1.D3 B1.D4 B1.D5 B1.D6 B1.D7 B1.D8 B1.D9 B1.D10 B1.D11 B1.D12 B1.D13 B1.D14 B1.D15 B1.D16 B1.D17 B1.D18 B1.D19 B1.D20 B1.E3 B1.E4 B1.E5 B1.E6 B1.E7 B1.E8 B1.E9 B1.E10 B1.E11 B1.E12 B1.E13 B1.E14 B1.E15 B1.E16 B1.E17 B1.E18 B1.E19 B1.E20 B1.F3 B1.F4 B1.F5 B1.F6 B1.F7 B1.F8 B1.F9 B1.F10 B1.F11 B1.F12 B1.F13 B1.F14 B1.F15 B1.F16 B1.F17 B1.F18 B1.F19 B1.F20 B1.G3 B1.G4 B1.G5 B1.G6 B1.G7 B1.G8 B1.G9 B1.G10 B1.G11 B1.G12 B1.G13 B1.G14 B1.G15 B1.G16 B1.G17 B1.G18 B1.G19 B1.G20 B1.H3 B1.H4 B1.H5 B1.H6 B1.H7 B1.H8 B1.H9 B1.H10 B1.H11 B1.H12 B1.H13 B1.H14 B1.H15 B1.H16 B1.H17 B1.H18 B1.H19 B1.H20 B1.J3 B1.J4 B1.J5 B1.J6 B1.J7 B1.J8 B1.J9 B1.J10 B1.J11 B1.J12 B1.J13 B1.J14 B1.J15 B1.J16 B1.J17 B1.J18 B1.J19 B1.J20 B1.K3 B1.K4 B1.K5 B1.K6 B1.K7 B1.K8 B1.K9 B1.K10 B1.K11 B1.K12 B1.K13 B1.K14 B1.K15 B1.K16 B1.K17 B1.K18 B1.K19 B1.K20 B1.L3 B1.L4 B1.L5 B1.L6 B1.L7 B1.L8 B1.L9 B1.L10 B1.L11 B1.L12 B1.L13 B1.L14 B1.L15 B1.L16 B1.L17 B1.L18 B1.L19 B1.L20 B1.M3 B1.M4 B1.M5 B1.M6 B1.M7 B1.M8 B1.M9 B1.M10 B1.M11 B1.M12 B1.M13 B1.M14 B1.M15 B1.M16 B1.M17 B1.M18 B1.M19 B1.M20 B1.N3 B1.N4 B1.N5 B1.N6 B1.N7 B1.N8 B1.N9 B1.N10 B1.N11 B1.N12 B1.N13 B1.N14 B1.N15 B1.N16 B1.N17 B1.N18 B1.N19 B1.N20 B1.P3 B1.P4 B1.P5 B1.P6 B1.P7 B1.P8 B1.P9 B1.P10 B1.P11 B1.P12 B1.P13 B1.P14 B1.P15 B1.P16 B1.P17 B1.P18 B1.P19 B1.P20 B1.R3 B1.R4 B1.R5 B1.R6 B1.R7 B1.R8 B1.R9 B1.R10 B1.R11 B1.R12 B1.R13 B1.R14 B1.R15 B1.R16 B1.R17 B1.R18 B1.R19 B1.R20 B1.T3 B1.T4 B1.T5 B1.T6 B1.T7 B1.T8 B1.T9 B1.T10 B1.T11 B1.T12 B1.T13 B1.T14 B1.T15 B1.T16 B1.T17 B1.T18 B1.T19 B1.T20 B1.U3 B1.U4 B1.U5 B1.U6 B1.U7 B1.U8 B1.U9 B1.U10 B1.U11 B1.U12 B1.U13 B1.U14 B1.U15 B1.U16 B1.U17 B1.U18 B1.U19 B1.U20 B1.V3 B1.V4 B1.V5 B1.V6 B1.V7 B1.V8 B1.V9 B1.V10 B1.V11 B1.V12 B1.V13 B1.V14 B1.V15 B1.V16 B1.V17 B1.V18 B1.V19 B1.V20 B1.W3 B1.W4 B1.W5 B1.W6 B1.W7 B1.W8 B1.W9 B1.W10 B1.W11 B1.W12 B1.W13 B1.W14 B1.W15 B1.W16 B1.W17 B1.W18 B1.W19 B1.W20 B1.Y3 B1.Y4 B1.Y5 B1.Y6 B1.Y7 B1.Y8 B1.Y9 B1.Y10 B1.Y11 B1.Y12 B1.Y13 B1.Y14 B1.Y15 B1.Y16 B1.Y17 B1.Y18 B1.Y19 B1.Y20
copper on no net:
  other v1: 4215.55,2665.35 4254.92,2665.35 4294.29,2665.35 4333.66,2665.35 4373.03,2665.35 4412.4,2665.35 4451.77,2665.35 4491.14,2665.35 4530.51,2665.35 4569.88,2665.35 4609.25,2665.35 4648.62,2665.35 4687.99,2665.35 4727.36,2665.35 4766.73,2665.35 4806.1,2665.35 4845.47,2665.35 4884.84,2665.35 4215.55,2704.72 4254.92,2704.72 4294.29,2704.72 4333.66,2704.72 4373.03,2704.72 4412.4,2704.72 4451.77,2704.72 4491.14,2704.72 4530.51,2704.72 4569.88,2704.72 4609.25,2704.72 4648.62,2704.72 4687.99,2704.72 4727.36,2704.72 4766.73,2704.72 4806.1,2704.72 4845.47,2704.72 4884.84,2704.72 4215.55,2744.09 4254.92,2744.09 4294.29,2744.09 4333.66,2744.09 4373.03,2744.09 4412.4,2744.09 4451.77,2744.09 4491.14,2744.09 4530.51,2744.09 4569.88,2744.09 4609.25,2744.09 4648.62,2744.09 4687.99,2744.09 4727.36,2744.09 4766.73,2744.09 4806.1,2744.09 4845.47,2744.09 4884.84,2744.09 4215.55,2783.46 4254.92,2783.46 4294.29,2783.46 4333.66,2783.46 4373.03,2783.46 4412.4,2783.46 4451.77,2783.46 4491.14,2783.46 4530.51,2783.46 4569.88,2783.46 4609.25,2783.46 4648.62,2783.46 4687.99,2783.46 4727.36,2783.46 4766.73,2783.46 4806.1,2783.46 4845.47,2783.46 4884.84,2783.46 4215.55,2822.83 4254.92,2822.83 4294.29,2822.83 4333.66,2822.83 4373.03,2822.83 4412.4,2822.83 4451.77,2822.83 4491.14,2822.83 4530.51,2822.83 4569.88,2822.83 4609.25,2822.83 4648.62,2822.83 4687.99,2822.83 4727.36,2822.83 4766.73,2822.83 4806.1,2822.83 4845.47,2822.83 4884.84,2822.83 4215.55,2862.2 4254.92,2862.2 4294.29,2862.2 4333.66,2862.2 4373.03,2862.2 4412.4,2862.2 4451.77,2862.2 4491.14,2862.2 4530.51,2862.2 4569.88,2862.2 4609.25,2862.2 4648.62,2862.2 4687.99,2862.2 4727.36,2862.2 4766.73,2862.2 4806.1,2862.2 4845.47,2862.2 4884.84,2862.2 4215.55,2901.57 4254.92,2901.57 4294.29,2901.57 4333.66,2901.57 4373.03,2901.57 4412.4,2901.57 4451.77,2901.57 4491.14,2901.57 4530.51,2901.57 4569.88,2901.57 4609.25,2901.57 4648.62,2901.57 4687.99,2901.57 4727.36,2901.57 4766.73,2901.57 4806.1,2901.57 4845.47,2901.57 4884.84,2901.57 4215.55,2940.94 4254.92,2940.94 4294.29,2940.94 4333.66,2940.94 4373.03,2940.94 4412.4,2940.94 4451.77,2940.94 4491.14,2940.94 4530.51,2940.94 4569.88,2940.94 4609.25,2940.94 4648.62,2940.94 4687.99,2940.94 4727.36,2940.94 4766.73,2940.94 4806.1,2940.94 4845.47,2940.94 4884.84,2940.94 4215.55,2980.31 4254.92,2980.31 4294.29,2980.31 4333.66,2980.31 4373.03,2980.31 4412.4,2980.31 4451.77,2980.31 4491.14,2980.31 4530.51,2980.31 4569.88,2980.31 4609.25,2980.31 4648.62,2980.31 4687.99,2980.31 4727.36,2980.31 4766.73,2980.31 4806.1,2980.31 4845.47,2980.31 4884.84,2980.31 4215.55,3019.68 4254.92,3019.68 4294.29,3019.68 4333.66,3019.68 4373.03,3019.68 4412.4,3019.68 4451.77,3019.68 4491.14,3019.68 4530.51,3019.68 4569.88,3019.68 4609.25,3019.68 4648.62,3019.68 4687.99,3019.68 4727.36,3019.68 4766.73,3019.68 4806.1,3019.68 4845.47,3019.68 4884.84,3019.68 4215.55,3059.05 4254.92,3059.05 4294.29,3059.05 4333.66,3059.05 4373.03,3059.05 4412.4,3059.05 4451.77,3059.05 4491.14,3059.05 4530.51,3059.05 4569.88,3059.05 4609.25,3059.05 4648.62,3059.05 4687.99,3059.05 4727.36,3059.05 4766.73,3059.05 4806.1,3059.05 4845.47,3059.05 4884.84,3059.05 4215.55,3098.43 4254.92,3098.43 4294.29,3098.43 4333.66,3098.43 4373.03,3098.43 4412.4,3098.43 4451.77,3098.43 4491.14,3098.43 4530.51,3098.43 4569.88,3098.43 4609.25,3098.43 4648.62,3098.43 4687.99,3098.43 4727.36,3098.43 4766.73,3098.43 4806.1,3098.43 4845.47,3098.43 4884.84,3098.43 4215.55,3137.8 4254.92,3137.8 4294.29,3137.8 4333.66,3137.8 4373.03,3137.8 4412.4,3137.8 4451.77,3137.8 4491.14,3137.8 4530.51,3137.8 4569.88,3137.8 4609.25,3137.8 4648.62,3137.8 4687.99,3137.8 4727.36,3137.8 4766.73,3137.8 4806.1,3137.8 4845.47,3137.8 4884.84,3137.8 4215.55,3177.17 4254.92,3177.17 4294.29,3177.17 4333.66,3177.17 4373.03,3177.17 4412.4,3177.17 4451.77,3177.17 4491.14,3177.17 4530.51,3177.17 4569.88,3177.17 4609.25,3177.17 4648.62,3177.17 4687.99,3177.17 4727.36,3177.17 4766.73,3177.17 4806.1,3177.17 4845.47,3177.17 4884.84,3177.17 4215.55,3216.54 4254.92,3216.54 4294.29,3216.54 4333.66,3216.54 4373.03,3216.54 4412.4,3216.54 4451.77,3216.54 4491.14,3216.54 4530.51,3216.54 4569.88,3216.54 4609.25,3216.54 4648.62,3216.54 4687.99,3216.54 4727.36,3216.54 4766.73,3216.54 4806.1,3216.54 4845.47,3216.54 4884.84,3216.54 4215.55,3255.91 4254.92,3255.91 4294.29,3255.91 4333.66,3255.91 4373.03,3255.91 4412.4,3255.91 4451.77,3255.91 4491.14,3255.91 4530.51,3255.91 4569.88,3255.91 4609.25,3255.91 4648.62,3255.91 4687.99,3255.91 4727.36,3255.91 4766.73,3255.91 4806.1,3255.91 4845.47,3255.91 4884.84,3255.91 4215.55,3295.28 4254.92,3295.28 4294.29,3295.28 4333.66,3295.28 4373.03,3295.28 4412.4,3295.28 4451.77,3295.28 4491.14,3295.28 4530.51,3295.28 4569.88,3295.28 4609.25,3295.28 4648.62,3295.28 4687.99,3295.28 4727.36,3295.28 4766.73,3295.28 4806.1,3295.28 4845.47,3295.28 4884.84,3295.28 4215.55,3334.65 4254.92,3334.65 4294.29,3334.65 4333.66,3334.65 4373.03,3334.65 4412.4,3334.65 4451.77,3334.65 4491.14,3334.65 4530.51,3334.65 4569.88,3334.65 4609.25,3334.65 4648.62,3334.65 4687.99,3334.65 4727.36,3334.65 4766.73,3334.65 4806.1,3334.65 4845.47,3334.65 4884.84,3334.65

## Silkscreen, mask and mechanical layers (free items; w line width, h text height)
Top Overlay:
  text "2" at 3587,4649 h40
  text "3" at 3687,4649 h40
  text "4" at 3787,4649 h40
  text "5" at 3887,4649 h40
  text "6" at 3987,4649 h40
  text "7" at 4087,4649 h40
  text "8" at 4187,4649 h40
  text "9" at 4287,4649 h40
  text "10" at 4370,4649 h40
  text "11" at 4477,4649 h40
  text "12" at 4570,4649 h40
  text "13" at 4670,4649 h40
  text "14" at 4770,4649 h40
  text "15" at 4870,4649 h40
  text "16" at 4970,4649 h40
  text "17" at 5070,4649 h40
  text "18" at 5170,4649 h40
  text "19" at 5270,4649 h40
  text "20" at 5367,4649 h40
  text "21" at 5474,4649 h40
  text "1" at 3293,4449 h40
  text "22" at 5767,4449 h40
Mechanical 1:
  the board outline again, w10.63
Mechanical 15:
  circle w10.63: c4550,3000 r640.43
  lines w10: 3000,2000 3500,1500 ; 3000,2100 3600,1500 ; 3000,3000 6100,3000 ; 3000,4000 3600,4600 ; 3100,1500 6000,4500 ; 3100,4500 6000,1500 ; 4550,1500 4550,4600 ; 5500,1500 6100,2100 ; 5500,4600 6100,4000 ; 5600,1500 6100,2000